# Altium PCB Relay_Controller_REV4.PcbDoc (part 2 of 2)
Units mil, origin at the board's own origin, x right, y up, seen from the top; angles counter-clockwise.
Board outline 5513 x 4000 mil, 2 copper layers (Top Layer, Bottom Layer), stack 62.2 mil thick; 134 components, 86 nets, 434 pads, 146 vias.
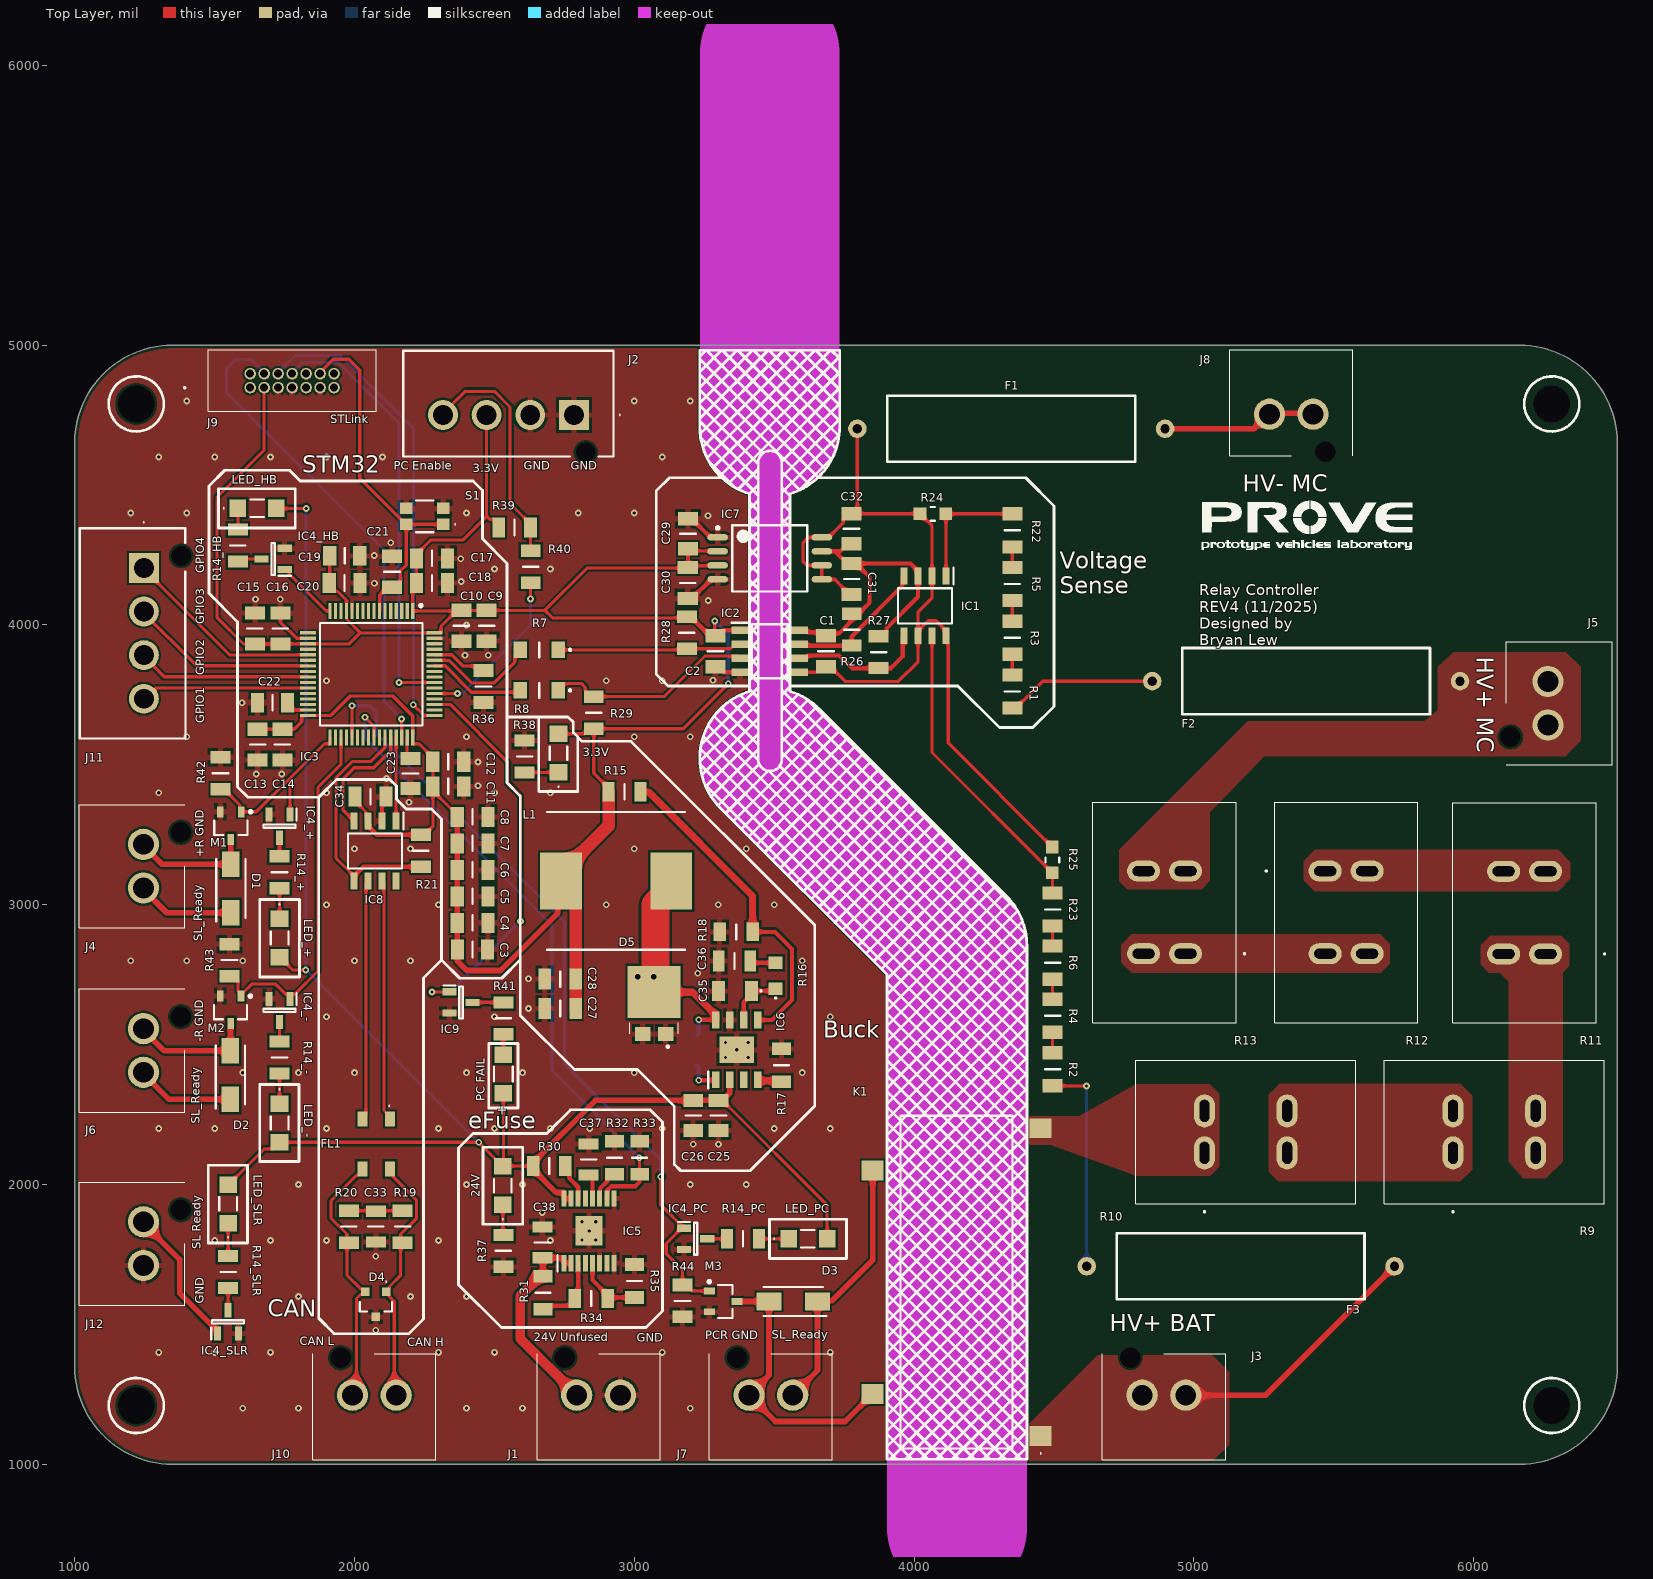
[diagram p0: Top Layer view]

## Via types
v1: diameter 24.02, hole 11.81, Top Layer to Bottom Layer, 144 vias
v2: diameter 33, hole 20, Top Layer to Bottom Layer, 2 vias

## Nets (pads, with @x,y where several pads share a name; then routed paths per layer and width w, separated by ;. In a path a pad name is that pad's centre, name@x,y a point inside that pad or via, vN(x,y) a via of type N, cw(c..) or ccw(c..) an arc to the next point about the centre after c; other vN are vias at no path point) (continued)
GND: (continued)
  other v1: 1600,1200 1800,1200 2400,1200 2600,1200 3200,1200 1300,1400 1500,1400 1700,1400 2300,1400 2500,1400 3100,1400 3700,1400 2076,1479 1800,1600 2200,1600 2400,1600 2076,1744 1500,1800 1700,1800 1900,1800 2300,1800 2700,1800 2813,1802 2862,1802 2839,1834 2813,1867 2862,1867 2671,1900 1800,2000 2400,2000 2600,2000 3200,2000 3400,2000 3211,2144 3301,2144 1300,2200 1500,2200 1900,2200 2300,2200 2500,2200 2700,2200 2841,2200 3100,2200 3500,2200 3700,2200 1600,2400 1800,2400 2000,2400 2400,2400 2600,2400 3000,2400 3600,2400 3325.65,2453.67 3407.34,2453.67 3366,2481.23 3325.65,2507.8 3407.34,2507.8 1900,2600 2500,2600 3700,2600 2622,2629 2622,2735 3227,2755 1200,2800 1400,2800 1600,2800 2000,2800 2200,2800 3600,2800 1900,3000 2300,3000 2900,3000 3300,3000 3500,3000 2000,3200 2200,3200 3000,3200 3400,3200 2195,3366 1300,3400 1900,3400 2500,3400 2700,3400 2441,3425 2114,3451 1649,3467 1740,3467 2441,3510 1400,3600 2400,3600 3000,3600 3200,3600 1598,3722 1900,3800 2900,3800 3100,3800 3281,3802 2395,3892 2478,3892 2400,4000 3264,4087 1646,4092 1735,4092 2071,4149 2381,4155 2500,4200 2700,4200 2380,4237 2070,4248 2129,4294 3263,4390 1200,4400 1400,4400 2400,4400 2800,4400 3000,4400 1300,4600 1500,4600 1700,4600 1900,4600 2100,4600 3100,4600 1400,4800 3000,4800 3200,4800
Heartbeat: IC3.16 IC4_HB.1 | length 228.6
  Top Layer w11: IC4_HB.1 1759.2,4198.2 1766.49,4190.91 1766.49,4182.05 1898.64,4049.91 IC3.16
"HV+ BAT": F3.1 J3.1 J3.2 K1.1 | length 937
  Top Layer w20: J3.2 5256,1247 F3.1
"HV+ BAT Divided": IC1.7 R23.1 R25.1 | length 1097.8
  Top Layer w11: IC1.7 4064,3543.74 R25.1 4495,3112.74 R23.1
"HV+ Battery": F3.2 R2.2 | length 765.8
  Top Layer w11: R2.2 4495.89,2352 v1(4616,2352)
  Bottom Layer w11: v1(4616,2352) 4616.5,2351.5 4616.5,1708.5 F3.2
"HV+ MC": F2.2 R1.2 | length 539.8
  Top Layer w11.81: R1.2 4362.81,3702.94 4458.87,3799 F2.2
"HV+ MC Divided": IC1.1 R22.1 R24.1 | length 460.3
  Top Layer w11.81: IC1.1 4114,4396.26 R24.1 4350.94,4397 R22.1
"HV+ MC Unfused": F2.1 J5.1 J5.2 R13.2 R13.3
HV-: C1.2 C31.2 C32.2 F1.2 IC1.2 IC1.6 IC1.8 IC2.5 IC7.5 IC7.6 IC7.8 R24.2 R25.2 | length 3204.2
  Top Layer w11.81: IC2.5 3649.37,3831 3669.25,3850.88 C1.2 3700.75,3850.88 3753.63,3798 3943,3798 4014,3869 IC1.6 ; C31.2 3761.04,4108.88 3746.87,4123.06 3746.87,4131.98 3715.85,4163 IC7.5 IC7.6 3616,4213 3603,4226 3603,4294 3621.86,4312.86 3669.89,4312.86 IC7.8 3694.63,4313 3746.87,4365.24 3746.87,4382.39 3762.02,4397.54 C32.2 ; F1.2 3797,4412.7 3781.84,4397.54 C32.2 ; R25.2 4122,3578.26 4122,3932.63 4120.89,3933.74 4120.89,3937.11 4114,3944 4114,3978.45 4076.45,4016 4051.55,4016 4014,3978.45 4014,4047 4064,4097 IC1.2 4064,4353.74 R24.2 4020.2,4397.54 C32.2
"HV- MC Unfused": F1.1 J8.1 J8.2 | length 552.2
  Top Layer w20: F1.1 5214.1,4701 5270.09,4756.99 J8.1@5426,4756.99
ILI: IC5.11 R32.1 | length 114.8
  Top Layer w15: IC5.11 2877.54,1951.7 2877.54,1985.48 2903.04,2010.98 2903.04,2021.81 2918.17,2036.94 R32.1
IMON: IC3.41 IC5.10 R33.1 | length 2310
  Top Layer w11: v1(2037.61,3669.62) 2069.84,3637.39 IC3.41 ; v1(3018,2096) 3018,2037.94 R33.1
  Top Layer w15: IC5.10 2903.13,1951.7 2903.13,1979.56 2917.71,1994.14 3004.42,1994.14 3019,2008.73 R33.1
  Bottom Layer w11: v1(2037.61,3669.62) 2037.61,3595.39 2706,2927 2706,2408 v1(3018,2096)
Net3.3V_1: 3.3V.1 R38.1 | length 121.1
  Top Layer w11: R38.1 2608.19,3473.1 3.3V.1
Net24V_1: 24V.1 R37.1 | length 107.8
  Top Layer w11: 24V.1 2530,1822.09 R37.1
NetC33_1: C33.1 R19.2 R20.2 | length 192.8
  Top Layer w11: R20.2 C33.1@2076.39,1906.61 ; C33.1 2078.36,1906.61 R19.2
NetC36_1: C36.1 R16.2 | length 93.9
  Top Layer w15: C36.1 3420.65,2792.26 R16.2
NetIC3_21: IC3.21 J11.1 | length 720.9
  Top Layer w11: J11.1@1242,4203.81 1552.91,3892.9 IC3.21
NetIC3_23: IC3.23 J11.2 | length 672.6
  Top Layer w12: J11.2@1242,4047.91 1436.38,3853.53 IC3.23
NetIC3_25: IC3.25 J11.3 | length 624.3
  Top Layer w12: J11.3@1242,3892 1319.84,3814.16 IC3.25
NetIC3_27: IC3.27 J11.4 | length 608.1
  Top Layer w12: J11.4@1242,3736.09 1253.63,3736.09 1292.32,3774.79 IC3.27
NetIC3_58: IC3.58 R8.2 | length 347.4
  Top Layer w12: IC3.58 2323.47,3853.53 2417,3760 2586.09,3760 R8.2
NetIC3_59: IC3.59 R7.2 | length 402.9
  Top Layer w11: IC3.59 2337.79,3873.21 2418,3793 2499,3793 2572.98,3866.98 2572.98,3891.89 R7.2
NetIC4_+_3: IC4_+.3 R14_+.2 | length 66.6
  Top Layer w11: R14_+.2 IC4_+.3
NetIC4_-_3: IC4_-.3 R14_-.2 | length 69.6
  Top Layer w11: R14_-.2 IC4_-.3
NetIC4_HB_3: IC4_HB.3 R14_HB.2 | length 88.4
  Top Layer w11: R14_HB.2 1592.09,4236 IC4_HB.3
NetIC4_PC_3: IC4_PC.3 R14_PC.2 | length 70.7
  Top Layer w11: IC4_PC.3 R14_PC.2
NetIC4_SLR_3: IC4_SLR.3 R14_SLR.2 | length 79.6
  Top Layer w11: IC4_SLR.3 R14_SLR.2
NetIC9_3: IC9.3 R41.2 | length 110.2
  Top Layer w11.81: IC9.3 2531.76,2650.9 R41.2
NetK1_2: K1.2 R9.1 R9.4
NetLED_+_1: LED_+.1 R14_+.1 | length 109
  Top Layer w11: LED_+.1 R14_+.1
NetLED_-_1: LED_-.1 R14_-.1 | length 108
  Top Layer w11: LED_-.1 R14_-.1
NetLED_HB_1: LED_HB.1 R14_HB.1 | length 76
  Top Layer w11: R14_HB.1 1583.1,4341.19 LED_HB.1
NetLED_PC_1: LED_PC.1 R14_PC.1 | length 106.2
  Top Layer w11: R14_PC.1 3551.29,1806 LED_PC.1
NetLED_SLR_1: LED_SLR.1 R14_SLR.1 | length 118
  Top Layer w11: R14_SLR.1 LED_SLR.1
"NetPC FAIL_1": "PC FAIL.1" R41.1 | length 65
  Top Layer w11.81: 2532,2472.02 R41.1
NetR1_1: R1.1 R3.2 | length 73.9
  Top Layer w11.81: R1.1 R3.2
NetR2_1: R2.1 R4.2 | length 72.9
  Top Layer w11: R2.1 R4.2
NetR3_1: R3.1 R5.2 | length 73.9
  Top Layer w11.81: R3.1 R5.2
NetR4_1: R4.1 R6.2 | length 71.8
  Top Layer w11: R4.1 R6.2
NetR5_1: R5.1 R22.2 | length 73.9
  Top Layer w11.81: R5.1 R22.2
NetR6_1: R6.1 R23.2 | length 71.9
  Top Layer w11: R6.1 R23.2
NetR9_2: R9.2 R9.3 R10.1 R10.4
NetR10_2: R10.2 R10.3 R11.1 R11.4
NetR11_2: R11.2 R11.3 R12.1 R12.4
NetR12_2: R12.2 R12.3 R13.1 R13.4
NRST: C21.1 IC3.7 J9.12 S1.1 S1.3 | length 1298.7
  Top Layer w12: J9.12@1877,4903 1877,4903.24 1923.76,4950 1980,4950 2019,4911 2019,4523.54 2183.09,4359.46 S1.3 S1.1 ; IC3.7 2089.53,4106.16 2118.25,4134.88 C21.1 2149.75,4134.88 2163.83,4148.96 2163.83,4192.83 2185,4214 S1.3@2185,4359.46
OVP: IC5.5 R34.2 R35.1 | length 245.7
  Top Layer w15: IC5.5 2850.59,1658.29 2905.06,1603.83 R34.2 2908,1595.94 R35.1
"PC Signal": IC3.37 IC4_PC.1 M3.1 R44.1 | length 2872.2
  Top Layer w11: v1(1991,3711) 1991.05,3710.95 IC3.37 IC3.37 ; v1(3094,2028) 3094,1927.43 IC4_PC.1 3168.77,1843.8 3114,1789.02 3114,1752.62 3172,1694.62 R44.1 3184.8,1641.09 3206.48,1619.4 M3.1
  Bottom Layer w11: v1(1991,3711) 2055,3711 2076,3690 2076,3614 2750,2940 2750,2432 3094,2088 v1(3094,2028)
PC_Enable: J2.4 R39.1 R40.1 | length 840.6
  Top Layer w11: J2.4@2316.09,4755.42 2395.68,4835 2500,4835 2555.86,4779.14 2555.86,4434.11 2629.17,4360.8 R39.1 2629.17,4265.91 R40.1
PC_Fail: IC3.51 IC9.1 | length 1417.6
  Top Layer w11.81: v1(2277,2688) 2277.35,2688.35 2338.83,2688.35 IC9.1 ; IC3.51 2341.27,3715.73 2547,3510 2547,3435 2593,3389 v1(2593,2941)
  Bottom Layer w11.81: v1(2277,2688) 2340,2688 v1(2593,2941)
PCE: IC3.53 R40.2 | length 596
  Top Layer w11: IC3.53 2286.02,3754.99 2367.84,3754.99 v1(2367.95,3754.88) ; v1(2629,4093) 2629,4149.91 R40.2
  Bottom Layer w11: v1(2367.95,3754.88) 2383.88,3754.88 2629,4000 v1(2629,4093)
"Precharge Relay GND": D3.2 J7.1 K1.4 M3.3 | length 1001.4
  Top Layer w20: M3.3 D3.2 3481.39,1318.39 J7.1 3504,1153 3753.61,1153 K1.4
RT/CLK: IC6.4 R17.1 | length 90.1
  Top Layer w25: IC6.4 3441,2371 3441.3,2370.7 3522.24,2370.7 R17.1
SCL: IC2.3 R8.1 R29.2 | length 762
  Top Layer w11: R8.1 2727.91,3770.92 2747.02,3790.03 2811.51,3790.03 2825.07,3776.47 2825.07,3759.24 2841.22,3743.09 R29.2 ; R29.2@2848.11,3744 3107.48,3744 3252.48,3889 3348.46,3889 3349.17,3888.3 3369.93,3888.3 IC2.3
"SCL (High Side)": IC1.5 IC2.6 R27.2 | length 484.8
  Top Layer w15: IC2.6 3608,3881 3618,3891 3732,3891 3777.63,3845.37 R27.2 3917.37,3845.37 3959,3887 3959,3956.23 IC1.5
SDA: IC2.2 R7.1 R28.2 | length 645
  Top Layer w11: R7.1 R28.2@3177,3911 ; R28.2 3343.92,3914.91 3360,3931 IC2.2
"SDA (High Side)": IC1.4 IC2.7 R26.2 | length 514.7
  Top Layer w15: IC2.7 3595.86,3925.91 R26.2 3777,3958.57 3958.7,4140.27 3958.7,4169.48 IC1.4
SL_Ready: D1.1 D2.1 D3.1 IC4_SLR.1 J4.2 J6.2 J7.2 J12.1 K1.3 | length 2168.4
  Top Layer w20: J12.1@1240.43,1867 1375,1732.43 1375,1611.72 1510.2,1476.52 IC4_SLR.1 ; J6.2@1240.43,2401.09 1337.13,2304.39 D2.1 ; J4.2@1240.43,3060 1329.04,2971.39 D1.1 ; J7.2 3654.61,1335.71 D3.1 3657.12,1584.51 3706.51,1584.51 3852,1730 K1.3@3852,2047
SW: C24.2 D5.3 IC6.8 L1.1 | length 811.3
  Top Layer w15: v1(3230,2589) 3290,2589 IC6.8
  Top Layer w25: D5.3 3208.42,2687.8 3291,2605.22 IC6.8
  Top Layer w100: D5.3 3075,2691.86 3075,3000.59 3131.85,3057.44 L1.1
  Bottom Layer w15: C24.2 3230,2540.12 v1(3230,2589)
  other v2: 3012,2743 3070,2743
SWCLK: IC3.49 J9.6 | length 1695.5
  Top Layer w11: v1(2210,3715) 2248.64,3676.36 IC3.49
  Bottom Layer w11: J9.6@1727,4903 1787,4963 1950,4963 2210,4703 v1(2210,3715)
SWDIO: IC3.46 J9.4 | length 1742.2
  Top Layer w11: v1(2168,3664) 2168.13,3663.87 2168.13,3598.23 IC3.46
  Bottom Layer w11: J9.4@1677,4903 1632,4948 1576,4948 1543,4915 1543,4830 2105,4268 2105,3727 v1(2168,3664)
SWO: IC3.55 J9.8 | length 1540.2
  Top Layer w11: v1(2159,3794) 2159.24,3794.24 2285.67,3794.24 IC3.55
  Bottom Layer w11: J9.8@1777,4903 1812.03,4938.03 1941.51,4938.03 2159,4720.54 v1(2159,3794)
UVLO: IC5.3 R31.2 R34.1 | length 267.3
  Top Layer w15: R31.2 2686.42,1567 2766.39,1567 2766.42,1567.04 2771.81,1567.04 2786.94,1582.17 R34.1 2799.41,1605.46 IC5.3
VCAP1: C22.1 IC3.31 | length 90.4
  Top Layer w11: C22.1 1760.54,3711.61 1776.11,3696.05 IC3.31
VCAP2: C23.1 IC3.47 | length 80.5
  Top Layer w11: C23.1@2187.95,3534.59 IC3.47
  Top Layer w12: C23.1@2187.95,3534.59 C23.1
pads on no net: IC3.2 IC3.3 IC3.4 IC3.5 IC3.6 IC3.8 IC3.9 IC3.10 IC3.11 IC3.14 IC3.15 IC3.17 IC3.20 IC3.22 IC3.24 IC3.26 IC3.28 IC3.29 IC3.30 IC3.34 IC3.36 IC3.38 IC3.39 IC3.40 IC3.42 IC3.50 IC3.52 IC3.54 IC3.56 IC3.57 IC3.61 IC3.62 IC5.4 IC5.7 IC5.13 IC6.3 IC8.8 J1.3 J2.5 J3.3 J4.3 J5.3 J6.3 J7.3 J8.3 J9.1 J9.2 J9.9 J9.10 J9.13 J9.14 J10.3 J11.5 J12.3

## Polygon pours and split planes (outlines as drawn)
NetK1_2 on Top Layer "NETK1_2_L01_P009" (solid, pour order 9): 4587.68,2244 4414,2244 4399.74,2229.74 4399.74,2158.6 4413.31,2143 4486.48,2143 4794.67,2032 5058.25,2032 5090,2063.75 5090,2325 5054,2361 4794.67,2359.08
"HV+ MC Unfused" on Top Layer "HV+_MC_UNFUSED_L01_P029" (solid, pour order 29): 4733,3084 4761,3056 5028,3056 5057,3085 5057,3330 5251,3531 6327,3531 6382,3586 6382,3850 6329,3903 5928,3903 5872,3850 5872,3695 5824,3655 5192,3655 4733,3196
NetR12_2 on Top Layer "NETR12_2_L01_P017" (solid, pour order 17): 4741,2857.43 4741,2793 4778,2756 5667,2756 5700.43,2789.43 5700.43,2860 5666.43,2894 4777.57,2894
NetR11_2 on Top Layer "NETR11_2_L01_P015" (solid, pour order 15): 5392.57,3156 5392.57,3088 5432.57,3048 6301.43,3048 6345.43,3092 6345.43,3152 6301.43,3196 5432.57,3196
NetR10_2 on Top Layer "NETR10_2_L01_P014" (solid, pour order 14): 6054.04,2757 6092.57,2757 6124.91,2724.67 6124.91,2081.5 6176.6,2022 6258.17,2022 6317.67,2081.5 6317.67,2757 6342,2781.33 6342,2860 6313,2889 6059,2889 6024.52,2854.52 6024.52,2786.52
NetR9_2 on Top Layer "NETR9_2_L01_P013" (solid, pour order 13): 5267,2320 5267,2045 5301,2011 5951.67,2011 5994,2053.33 5994,2316.96 5950.96,2360 5307,2360
GND on Top Layer "Top Layer-GND" (solid, pour order 6): 1002.17,1359.64 1002.17,1009.64 1352.17,1009.64 4187.17,1009.64 4187.17,2709.64 3476,3420.81 3476,5009.64 1002.17,5009.64
"HV+ BAT" on Top Layer "HV+_BAT_L01_P007" (solid, pour order 7): 4408.5,1142.5 4408.5,1009.5 5065.5,1009.5 5125.5,1069.5 5125.5,1329.5 5065.5,1389.5 4655.5,1389.5
no net on Top Overlay (hatched 45Degree grid 39.37 track 10): 3307.21,3346.21 cw(c3484,3523) 3411.49,3762.27 3411.49,4468.73 cw(c3484,4708) 3233.99,4708 3233.98,6045 cw(c3484,6045) 3734.01,6045 3734.01,4708 cw(c3484,4708) 3556.51,4468.73 3556.51,3762.27 cw(c3484,3523) 3660.79,3699.79 4329.82,3030.76 4329.79,3030.79 cw(c4153.03,2853.97) 4403.04,2853.97 4403.04,773 cw(c4153.03,773) 3903.01,773 3903.01,2750.41
GND on Bottom Layer "Bottom Layer-GND" (solid, pour order 27): 3646,1297 3646,1009.64 4187.17,1009.64 4187.17,2709.64 3476,3420.81 3476,5009.64 1002.17,5009.64 1002.17,3142 1283.6,3142 1326,3100.11 1326,3017 1283.6,2974.6 1179,2974.6 1143.5,2939.1 1143.5,2517.5 1179,2482 1286,2482 1326,2442 1326,2356.35 1283.6,2321 1179,2321 1143.5,2285.5 1143.5,1983.45 1179.43,1946 1283.6,1947.17 1326,1904.78 1326,1825 1290,1789 1179,1789 1143.5,1753.5 1143.5,1459 1465.5,1137 3454,1137 3487,1170 3487,1297 3517,1327 3616,1327
SL_Ready on Bottom Layer "SL_READY_L02_P028" (solid, pour order 28): 996,990 3646,990 3646,1297 3616,1327 3517,1327 3487,1297 3487,1170 3454,1137 1465.5,1137 1143.5,1459 1143.5,1753.5 1179,1789 1290,1789 1326,1825 1326,1904.78 1283.6,1947.17 1179.43,1946 1143.5,1983.45 1143.5,2285.5 1179,2321 1283.6,2321 1326,2356.35 1326,2442 1286,2482 1179,2482 1143.5,2517.5 1143.5,2939.1 1179,2974.6 1283.6,2974.6 1326,3017 1326,3100.11 1283.6,3142 996,3142 996,3104 996,3109 996,3104

## Keep-outs
Keep-Out Layer:
  lines w145: 3484,3523 3484,4708
  lines w500: 3484,3523 4153.03,2853.97 4153.03,773 ; 3484,4708 3484,6045

## Silkscreen, mask and mechanical layers (free items; w line width, h text height)
Top Overlay:
  drawing of 151 lines, arcs and shapes, not listed
  text "STLink" at 1914.03,4721 h30
  text "PC Enable" at 2140.54,4554.95 h30
  text "GND" at 2604,4554.95 h30
  text "GND" at 2772,4554.95 h30
  text "3.3V" at 2422.03,4544.95 h30
  text "STM32" at 1814,4543 h60
  text "HV- MC" at 5174,4476 h60
  text "GPIO4" at 1463,4184 h30 r90
  text "Voltage / Sense" at 4521,4111 h60
  text "GPIO3" at 1463,4002 h30 r90
  text "Relay Controller / REV4 (11/2025) / Designed by / Bryan Lew" at 5019,3928 h39.37
  text "HV+ MC" at 6011,3887 h60 r270
  text "GPIO2" at 1463,3820 h30 r90
  text "GPIO1" at 1463,3648 h30 r90
  text "+R GND" at 1461,3169 h30 r90
  text "SL_Ready" at 1455,2870 h30 r90
  text "Buck" at 3675,2524 h60
  text "-R GND" at 1460,2511 h30 r90
  text "SL_Ready" at 1447,2218 h30 r90
  text "eFuse" at 2407,2199 h60
  text "SL Ready" at 1451,1768 h30 r90
  text "GND" at 1461,1574 h30 r90
  text "CAN" at 1690,1527 h60
  text "HV+ BAT" at 4699,1476 h60
  text "SL_Ready" at 3492,1448 h30
  text "PCR GND" at 3253,1447 h30
  text "24V Unfused" at 2640,1439 h30
  text "GND" at 3009,1438 h30
  text "CAN L" at 1805,1425 h30
  text "CAN H" at 2188,1422 h30
Mechanical 1:
  the board outline again, w10

## Text inside footprints (layer, text, board x,y; h text height)
"PC FAIL": Top Overlay "+" at 2514.28,2284.76 h35 r270